# Altium PCB LOAD CONTROL_Final2.PcbDoc
Units mm, origin at the board's own origin, x right, y up, seen from the top; angles counter-clockwise.
Board outline 51.64 x 106.92 mm, 2 copper layers (Top Layer, Bottom Layer); 86 components, 56 nets, 284 pads, 4 vias.
Unrouted connection lines stored in the file: 126.
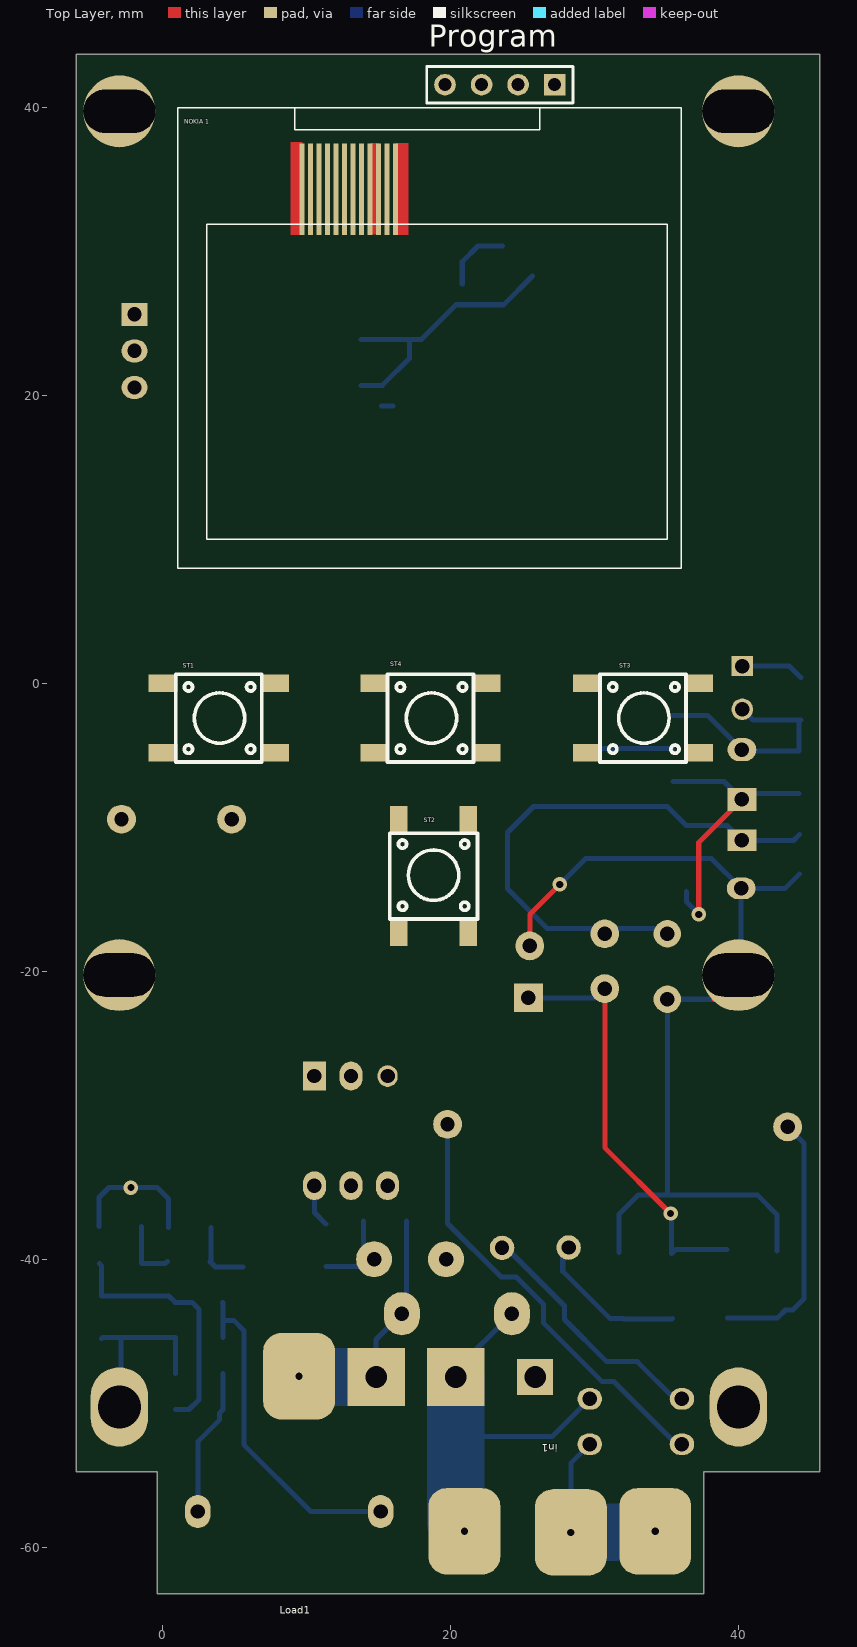
[diagram p0: Top Layer view]
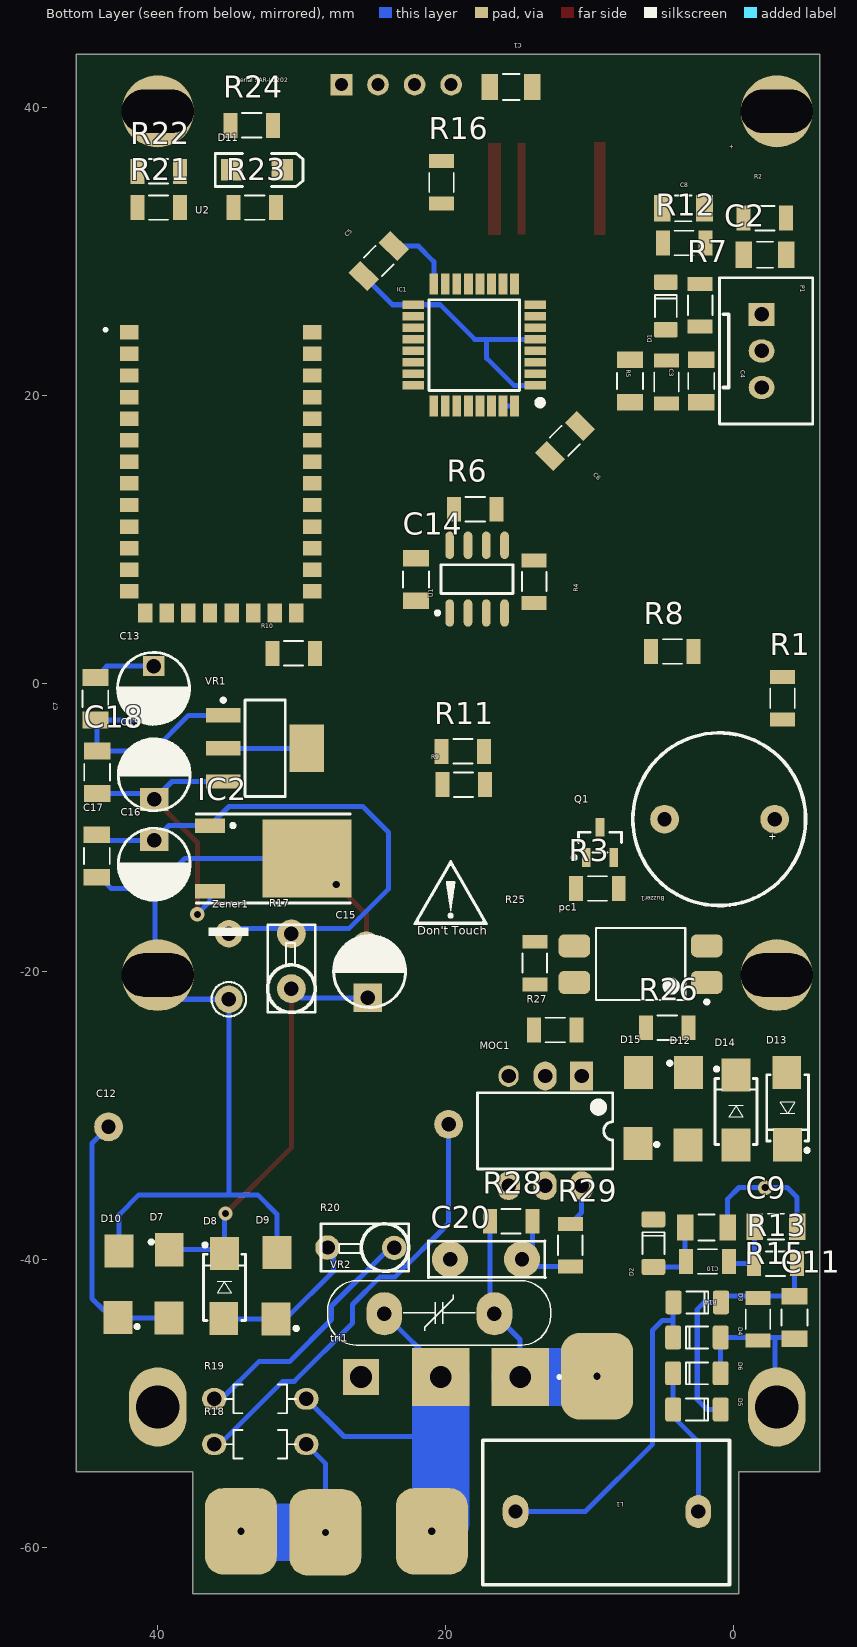
[diagram p1: Bottom Layer view, seen from below]

## Layer stack, top to bottom
Top Solder: solder mask 0.0102, Solder Resist, Dk 3.5
Top Layer: signal copper 0.0356
Dielectric 1: dielectric 0.32, FR-4, Dk 4.8
Bottom Layer: signal copper 0.0356
Bottom Solder: solder mask 0.0102, Solder Resist, Dk 3.5

## Board outline
-0.358,-63.231 -0.358,-54.77 -5.969,-54.77 -5.969,43.686 45.666,43.686 45.666,-54.77 37.592,-54.77 37.592,-63.231

## Design rules (kind name [scope] priority, off if disabled: settings)
Clearance Clearance_18 [InNamedPolygon('Top Layer-No Net')] p1: gap=0.4 ignorepadtopadclearanceinfootprint=FALSE
Clearance Clearance_17 [InNamedPolygon('Top Layer-No Net')] p2: gap=0.254 ignorepadtopadclearanceinfootprint=FALSE except(0: Arc-Hole Track-Hole SMDPad-Hole THPad-Hole Via-Hole Fill-Hole Poly-Hole Region-Hole Text-Hole)
Clearance Clearance_16 [InNamedPolygon('Top Layer-No Net')] p3: gap=0.4 ignorepadtopadclearanceinfootprint=FALSE
Clearance Clearance_15 [InNamedPolygon('GND_L02_P008')] p4: gap=0.3 ignorepadtopadclearanceinfootprint=TRUE
Clearance Clearance_14 [InNamedPolygon('GND_L01_P006')] p5: gap=0.381 ignorepadtopadclearanceinfootprint=TRUE
Clearance Clearance_13 [InNamedPolygon('GND_L01_P006')] p6: gap=0.381 ignorepadtopadclearanceinfootprint=TRUE
Clearance Clearance_12 [InNamedPolygon('GND_L01_P006')] p7: gap=0.2 ignorepadtopadclearanceinfootprint=FALSE
Clearance Clearance_11 [InNamedPolygon('GND_L01_P006')] p8: gap=0.254 ignorepadtopadclearanceinfootprint=FALSE except(0: Arc-Hole Track-Hole SMDPad-Hole THPad-Hole Via-Hole Fill-Hole Poly-Hole Region-Hole Text-Hole)
Clearance Clearance_10 [InNamedPolygon('GND_L02_P008')] p9: gap=0.5 ignorepadtopadclearanceinfootprint=FALSE
Clearance Clearance_9 [InNamedPolygon('GND_L01_P006')] p10: gap=0.5 ignorepadtopadclearanceinfootprint=FALSE
Clearance Clearance_8 [InNamedPolygon('GND_L01_P006')] p11: gap=0.254 ignorepadtopadclearanceinfootprint=FALSE except(0: Arc-Hole Track-Hole SMDPad-Hole THPad-Hole Via-Hole Fill-Hole Poly-Hole Region-Hole Text-Hole)
Clearance Clearance_7 [InNamedPolygon('GND_L01_P006')] p12: gap=0.5 ignorepadtopadclearanceinfootprint=FALSE
Clearance Clearance_6 [InNamedPolygon('GND_L01_P006')] p13: gap=0.254 ignorepadtopadclearanceinfootprint=FALSE except(0: Arc-Hole Track-Hole SMDPad-Hole THPad-Hole Via-Hole Fill-Hole Poly-Hole Region-Hole Text-Hole)
Clearance 0 [InNamedPolygon('GND_L01_P006')] p14: gap=0.254 ignorepadtopadclearanceinfootprint=FALSE except(0: Arc-Hole Track-Hole SMDPad-Hole THPad-Hole Via-Hole Fill-Hole Poly-Hole Region-Hole Text-Hole)
Clearance Clearance_5 [InNamedPolygon('GND_L01_P006')] p15: gap=0.254 ignorepadtopadclearanceinfootprint=FALSE except(0: Arc-Hole Track-Hole SMDPad-Hole THPad-Hole Via-Hole Fill-Hole Poly-Hole Region-Hole Text-Hole)
Clearance Clearance_4 [InNamedPolygon('GND-E_L02_P002')] p16: gap=0.508 ignorepadtopadclearanceinfootprint=FALSE
Clearance Clearance_3 [InNamedPolygon('GND_L01_P001')] p17: gap=0.635 ignorepadtopadclearanceinfootprint=FALSE
Clearance Clearance_2 [InNamedPolygon('GND_L02_P000')] p18: gap=0.508 ignorepadtopadclearanceinfootprint=FALSE
Clearance Clearance_1 [InNamedPolygon('Bottom Layer-GND')] p19: gap=0.356 ignorepadtopadclearanceinfootprint=FALSE
Clearance [All] p20: gap=0.3 ignorepadtopadclearanceinfootprint=FALSE
PolygonConnect PolygonConnect_14 [All vs IsNamedPolygon('GND_L02_P008')] p1: thpad.connectstyle=Relief thpad.reliefconductorwidth=0.762 thpad.reliefentries=4 thpad.polygonreliefangle="90 Angle" thpad.airgapwidth=0.3 smdpad.connectstyle=Relief smdpad.reliefconductorwidth=0.508 smdpad.reliefentries=4 smdpad.polygonreliefangle="90 Angle" smdpad.airgapwidth=0.3 via.connectstyle=Relief via.reliefconductorwidth=0.254 via.reliefentries=4 via.polygonreliefangle="90 Angle" via.airgapwidth=0.3
PolygonConnect PolygonConnect_13 [All vs IsNamedPolygon('GND_L01_P006')] p2: thpad.connectstyle=Relief thpad.reliefconductorwidth=0.889 thpad.reliefentries=4 thpad.polygonreliefangle="90 Angle" thpad.airgapwidth=0.254 smdpad.connectstyle=Relief smdpad.reliefconductorwidth=0.635 smdpad.reliefentries=4 smdpad.polygonreliefangle="90 Angle" smdpad.airgapwidth=0.254 via.connectstyle=Direct via.reliefconductorwidth=0.254 via.reliefentries=4 via.polygonreliefangle="90 Angle" via.airgapwidth=0.254
PolygonConnect PolygonConnect_12 [All vs IsNamedPolygon('GND_L01_P006')] p3: thpad.connectstyle=Relief thpad.reliefconductorwidth=0.889 thpad.reliefentries=4 thpad.polygonreliefangle="90 Angle" thpad.airgapwidth=0.254 smdpad.connectstyle=Relief smdpad.reliefconductorwidth=0.508 smdpad.reliefentries=4 smdpad.polygonreliefangle="90 Angle" smdpad.airgapwidth=0.254 via.connectstyle=Direct via.reliefconductorwidth=0.254 via.reliefentries=4 via.polygonreliefangle="90 Angle" via.airgapwidth=0.254
PolygonConnect PolygonConnect_11 [All vs IsNamedPolygon('GND_L01_P006')] p4: thpad.connectstyle=Relief thpad.reliefconductorwidth=0.508 thpad.reliefentries=4 thpad.polygonreliefangle="90 Angle" thpad.airgapwidth=0.254 smdpad.connectstyle=Relief smdpad.reliefconductorwidth=0.508 smdpad.reliefentries=4 smdpad.polygonreliefangle="90 Angle" smdpad.airgapwidth=0.254 via.connectstyle=Direct via.reliefconductorwidth=0.254 via.reliefentries=4 via.polygonreliefangle="90 Angle" via.airgapwidth=0.254
PolygonConnect PolygonConnect_10 [All vs IsNamedPolygon('GND_L01_P006')] p5: thpad.connectstyle=Relief thpad.reliefconductorwidth=0.254 thpad.reliefentries=4 thpad.polygonreliefangle="90 Angle" thpad.airgapwidth=0.254 smdpad.connectstyle=Relief smdpad.reliefconductorwidth=0.254 smdpad.reliefentries=4 smdpad.polygonreliefangle="90 Angle" smdpad.airgapwidth=0.254 via.connectstyle=Direct via.reliefconductorwidth=0.254 via.reliefentries=4 via.polygonreliefangle="90 Angle" via.airgapwidth=0.254
PolygonConnect PolygonConnect_9 [All vs IsNamedPolygon('GND_L01_P006')] p6: thpad.connectstyle=Direct thpad.reliefconductorwidth=0.254 thpad.reliefentries=4 thpad.polygonreliefangle="90 Angle" thpad.airgapwidth=0.254 smdpad.connectstyle=Relief smdpad.reliefconductorwidth=0.254 smdpad.reliefentries=4 smdpad.polygonreliefangle="90 Angle" smdpad.airgapwidth=0.254 via.connectstyle=Relief via.reliefconductorwidth=0.254 via.reliefentries=4 via.polygonreliefangle="90 Angle" via.airgapwidth=0.254
PolygonConnect PolygonConnect_8 [All vs IsNamedPolygon('GND_L01_P006')] p7: connectstyle=Relief reliefconductorwidth=0.254 reliefentries=4 polygonreliefangle="90 Angle" airgapwidth=0.254
PolygonConnect PolygonConnect_7 [All vs IsNamedPolygon('GND_L02_P008')] p8: connectstyle=Relief reliefconductorwidth=0.254 reliefentries=4 polygonreliefangle="90 Angle" airgapwidth=0.254
PolygonConnect PolygonConnect_6 [All vs IsNamedPolygon('GND_L02_P008')] p9: connectstyle=Direct reliefconductorwidth=0.254 reliefentries=4 polygonreliefangle="90 Angle" airgapwidth=0.254
PolygonConnect PolygonConnect_5 [All vs IsNamedPolygon('GND_L02_P008')] p10: thpad.connectstyle=Direct thpad.reliefconductorwidth=0.254 thpad.reliefentries=4 thpad.polygonreliefangle="90 Angle" thpad.airgapwidth=0.254 smdpad.connectstyle=Relief smdpad.reliefconductorwidth=0.254 smdpad.reliefentries=4 smdpad.polygonreliefangle="90 Angle" smdpad.airgapwidth=0.254 via.connectstyle=Relief via.reliefconductorwidth=0.254 via.reliefentries=4 via.polygonreliefangle="90 Angle" via.airgapwidth=0.254
PolygonConnect PolygonConnect_4 [All vs IsNamedPolygon('GND-E_L02_P002')] p11: thpad.connectstyle=Relief thpad.reliefconductorwidth=0.635 thpad.reliefentries=4 thpad.polygonreliefangle="90 Angle" thpad.airgapwidth=0.254 smdpad.connectstyle=Relief smdpad.reliefconductorwidth=0.381 smdpad.reliefentries=4 smdpad.polygonreliefangle="90 Angle" smdpad.airgapwidth=0.254 via.connectstyle=Direct via.reliefconductorwidth=0.254 via.reliefentries=4 via.polygonreliefangle="90 Angle" via.airgapwidth=0.254
PolygonConnect PolygonConnect_3 [All vs IsNamedPolygon('GND_L01_P001')] p12: thpad.connectstyle=Relief thpad.reliefconductorwidth=0.635 thpad.reliefentries=4 thpad.polygonreliefangle="90 Angle" thpad.airgapwidth=0.254 smdpad.connectstyle=Relief smdpad.reliefconductorwidth=0.635 smdpad.reliefentries=4 smdpad.polygonreliefangle="90 Angle" smdpad.airgapwidth=0.254 via.connectstyle=Direct via.reliefconductorwidth=0.254 via.reliefentries=4 via.polygonreliefangle="90 Angle" via.airgapwidth=0.254
PolygonConnect PolygonConnect_2 [All vs IsNamedPolygon('GND_L02_P000')] p13: thpad.connectstyle=Relief thpad.reliefconductorwidth=0.635 thpad.reliefentries=4 thpad.polygonreliefangle="90 Angle" thpad.airgapwidth=0.254 smdpad.connectstyle=Relief smdpad.reliefconductorwidth=0.254 smdpad.reliefentries=4 smdpad.polygonreliefangle="90 Angle" smdpad.airgapwidth=0.381 via.connectstyle=Direct via.reliefconductorwidth=0.254 via.reliefentries=4 via.polygonreliefangle="90 Angle" via.airgapwidth=0.254
PolygonConnect PolygonConnect_1 [All vs IsNamedPolygon('Bottom Layer-GND')] p14: thpad.connectstyle=Relief thpad.reliefconductorwidth=0.635 thpad.reliefentries=4 thpad.polygonreliefangle="90 Angle" thpad.airgapwidth=0.254 smdpad.connectstyle=Relief smdpad.reliefconductorwidth=0.381 smdpad.reliefentries=4 smdpad.polygonreliefangle="90 Angle" smdpad.airgapwidth=0.254 via.connectstyle=Direct via.reliefconductorwidth=0.254 via.reliefentries=4 via.polygonreliefangle="90 Angle" via.airgapwidth=0.254
PolygonConnect [All] p15: connectstyle=Direct reliefconductorwidth=0 reliefentries=2 polygonreliefangle="90 Angle" airgapwidth=0
RoutingVias [All] p1: holewidth=0.5 width=1 viastyle="Through Hole" minholewidth=0.5 minwidth=1 maxholewidth=0.5 maxwidth=1
SolderMaskExpansion [All] p1: expansion=0.102
Width [All] p1: maxlimit=4 minlimit=0.35 preferedwidth=0.5
30 further rules are at their usual default settings.

## Components (designator, comment, footprint, x,y, rotation, side; value= is the part's Value field where it differs from the comment)
Buzzer1 "Buzzer" BUZZER 0.838,-9.347 r270 bottom
C1 "C1206C120J5GACTU" CAPC3216X88N 15.469,41.427 r180 bottom
C2 "C1206C120J5GACTU" CAPC3216X88N -2.159,29.769 r180 bottom
C3 "C1206C120J5GACTU" CAPC3216X88N 7.214,21.006 r270 bottom
C4 "C1206C120J5GACTU" CAPC3216X88N 2.261,21.006 r90 bottom
C5 "C1206C120J5GACTU" CAPC3216X88N 24.663,29.337 r315 bottom
C6 "C1206C120J5GACTU" CAPC3216X88N 11.735,16.84 r135 bottom
C7 "C1206C120J5GACTU" CAPC3216X88N 44.348,-1.067 r90 bottom
C8 "C1206C120J5GACTU" CAPC3216X88N 3.505,32.995 r0 bottom
C9 "C1206C120J5GACTU" CAPC3216X88N -2.921,-37.744 r0 bottom
C10 "C1206C120J5GACTU" CAPC3216X88N 1.905,-37.795 r0 bottom
C11 "C1206C120J5GACTU" CAPC3216X88N -4.216,-44.044 r90 bottom
C12 "Cap" RAD-0.3 32.283,-33.426 r0 bottom value=1.5uf
C13 "1uF" "Cap electrolitic radial 5x11-2"#1 40.31,-0.254 r270 bottom
C14 "C1206C120J5GACTU" CAPC3216X88N 22.073,7.214 r90 bottom
C15 "1uF" "Cap electrolitic radial 5x11-2"#2 25.298,-20.117 r90 bottom
C16 "1uF" "Cap electrolitic radial 5x11-2"#3 40.259,-12.471 r270 bottom
C17 "C1206C120J5GACTU" CAPC3216X88N 44.247,-11.989 r90 bottom
C18 "C1206C120J5GACTU" CAPC3216X88N 44.221,-6.172 r270 bottom
C19 "1uF" "Cap electrolitic radial 5x11-2"#4 40.259,-6.452 r90 bottom
C20 "100nF" "Cap 10nF" 14.71,-40.005 r0 bottom
D1 "1N4148UR-1" "SOD80, LL-34" 4.724,26.213 r270 bottom
D2 "1N4148UR-1" "SOD80, LL-34" 5.588,-38.887 r270 bottom
D3 "1N4148UR-1" "SOD80, LL-34" 2.54,-43.002 r0 bottom
D4 "1N4148UR-1" "SOD80, LL-34" 2.565,-45.441 r180 bottom
D5 "1N4148UR-1" "SOD80, LL-34" 2.565,-50.444 r0 bottom
D6 "1N4148UR-1" "SOD80, LL-34" 2.565,-47.93 r180 bottom
D7 "1n4007" DIOM4629X24N#1 39.116,-41.758 r90 bottom
D8 "1n4007" DIOM4629X24N#2 35.382,-41.961 r90 bottom
D9 "1n4007" DIOM4629X24N#3 31.75,-41.859 r270 bottom
D10 "1n4007" DIOM4629X24N#4 42.799,-41.732 r270 bottom
D11 "SMD 1206 LED" "LED 1206" 33.122,35.662 r180 bottom
D12 "1n4007" DIOM4629X24N#5 3.099,-29.337 r90 bottom
D13 "1n4007" DIOM4629X24N#6 -3.734,-29.489 r270 bottom
D14 "1n4007" DIOM4629X24N#7 -0.152,-29.743 r90 bottom
D15 "1n4007" DIOM4629X24N#8 6.706,-29.083 r270 bottom
IC1 "STM32F030K6T6TR" QFP80P900X900X160-32N 18.034,23.495 r0 bottom
IC2 "L78M05" TO-252 33.02,-12.167 r270 bottom
in1 "220vIn" HDR1X2#1 48.438,-56.744 r0 top
L1 "0" ZMC 8.941,-57.531 r180 bottom value=300uH
Load1 "Header 2" HDR1X2#2 7.188,-67.234 r180 top
MOC1 "MOC3021-3" DIP-6 13.106,-31.09 r270 bottom
"NOKIA 1" "LCD2" "LCD NOKIA 1202" 18.732,23.98 r0 top
P1 "Header 3" 3PIN -1.93,23.089 r270 bottom
pc1 "PC817" "SMT Gullwing Lead-Form" 6.477,-19.507 r0 bottom
Program "Header 4" HDR1X4 27.254,41.58 r180 top
Q1 "BC817" SOT23_N 9.296,-11.049 r90 bottom
R1 "RC1206JR-0713RL" RESC3116X65N -3.378,-1.041 r270 bottom
R2 "RC1206JR-0713RL" RESC3116X65N -2.159,32.309 r0 bottom
R3 "RC1206JR-0713RL" RESC3116X65N 9.474,-14.249 r0 bottom
R4 "RC1206JR-0713RL" RESC3116X65N 13.868,7.061 r270 bottom
R5 "RC1206JR-0713RL" RESC3116X65N 4.674,20.93 r270 bottom
R6 "RC1206JR-0713RL" RESC3116X65N 17.965,12.09 r180 bottom
R7 "RC1206JR-0713RL" RESC3116X65N 2.337,26.264 r270 bottom
R8 "RC1206JR-0713RL" RESC3116X65N 4.267,2.21 r0 bottom
R9 "RC1206JR-0713RL" RESC3116X65N 18.771,-7.036 r0 bottom
R10 "RC1206JR-0713RL" RESC3116X65N 30.575,2.083 r0 bottom
R11 "RC1206JR-0713RL" RESC3116X65N 18.821,-4.724 r0 bottom
R12 "RC1206JR-0713RL" RESC3116X65N 3.454,30.582 r180 bottom
R13 "RC1206JR-0713RL" RESC3116X65N -2.896,-40.31 r180 bottom
R14 "RC1206JR-0713RL" RESC3116X65N 1.829,-40.157 r180 bottom
R15 "RC1206JR-0713RL" RESC3116X65N -1.676,-44.171 r90 bottom
R16 "RC1206JR-0713RL" RESC3116X65N 20.301,34.798 r90 bottom
R17 "10r" RES-(1/2)-Stand#1 30.734,-21.209 r90 bottom
R18 "1614997-1" RESAD640W45L370D200 32.893,-52.857 r0 bottom
R19 "1614997-1" RESAD640W45L370D200 32.893,-49.708 r0 bottom
R20 "10r" RES-(1/2)-Stand#2 24.232,-39.192 r0 bottom
R21 "RC1206JR-0713RL" RESC3116X65N 39.954,33.045 r180 bottom
R22 "RC1206JR-0713RL" RESC3116X65N 39.954,35.56 r180 bottom
R23 "RC1206JR-0713RL" RESC3116X65N 33.274,33.045 r0 bottom
R24 "RC1206JR-0713RL" RESC3116X65N 33.484,38.76 r0 bottom
R25 "RC1206JR-0713RL" RESC3116X65N 13.818,-19.431 r90 bottom
R26 "RC1206JR-0713RL" RESC3116X65N 4.623,-23.927 r0 bottom
R27 "RC1206JR-0713RL" RESC3116X65N 12.402,-24.079 r0 bottom
R28 "RC1206JR-0713RL" RESC3116X65N 15.469,-37.363 r0 bottom
R29 "RC1206JR-0713RL" RESC3116X65N 11.354,-39.033 r90 bottom
ST1 "SW-PB" "PUSH BOTTOM 6*6" 3.974,-2.286 r90 top
ST2 "SW-PB" "PUSH BOTTOM 6*6" 18.716,-13.327 r180 top
ST3 "SW-PB" "PUSH BOTTOM 6*6" 33.451,-2.286 r90 top
ST4 "SW-PB" "PUSH BOTTOM 6*6" 18.694,-2.286 r90 top
tri1 "BTA41" TO552P1530X450X2110-3B 20.371,-48.184 r0 bottom
U1 "Serial EEPROM(24C04)" SO8_L 17.831,7.239 r90 bottom
U2 "HC-05" XCVR_HC-05 35.636,18.059 r180 bottom
VR1 "AMS1117-xx" SOT-223 32.563,-4.521 r0 bottom
VR2 "xxDxxx" "14D XXX" 20.472,-43.739 r180 bottom
Zener1 "Diode Zener" "Diode 1W_Stand" 35.103,-19.964 r90 bottom

## Footprints (in the part's own frame and the unit in brackets; to place one, negate y for a bottom-side part, rotate by r counter-clockwise, add the part's x,y. Pads: shape width x height; smd on the part's side, far side on the other; paste and mask are expansions set on the pad)
3PIN [mm]
  rect 1.6x1.8 hole 1: 1(-2.54,0)
  oval 1.6x1.8 hole 1: 2(0,0) 3(2.54,0)
  silkscreen extent -5.08,-2.92 5.08,3.56, body extent -4.95,-2.9 4.95,3.49, height 7
"14D XXX" [mm] "MOV-14DxxxK Metal Oxide Varistors (MOVs) are 14 mm-Design:Abbas Basereh"
  oval 2.5x3 hole 1: 1(3.836,-0.051) 2(-3.81,-0.051)
  silkscreen extent -7.75,-2.25 7.75,2.25, body extent -7.73,-2.1 7.77,2.1, height 19.5
BUZZER [mm]
  round 2 hole 1: 1(0.092,3.675) 2(0.092,-3.975)
  silkscreen extent -5.91,-6.17 6.09,5.82, body extent -5.75,-6.25 6.25,5.75, height 9.5
"Cap 10nF" [mm]
  round 2.5 hole 1: 1(0,0) 2(5,0)
  silkscreen extent -1.62,-1.28 6.51,1.29
"Cap electrolitic radial 5x11-2"#1 [mm] "Cap electrolitic radial 5x11-2-Design:Abbas Basereh"
  rect 1.4x1.5 hole 1: 1(-1.448,0.025)
  round 1.5 hole 1: 2(1.549,0.025)
  silkscreen extent -2.4,-2.5 2.6,2.5, body extent -2.5,-2.5 2.5,2.5, height 11.3
"Cap electrolitic radial 5x11-2"#2 [mm] "Cap electrolitic radial 5x11-2-Design:Abbas Basereh"
  rect 2x2 hole 1: 1(-1.727,0.127)
  round 2 hole 1: 2(1.88,0.229)
  silkscreen extent -2.4,-2.5 2.6,2.5, body extent -2.5,-2.5 2.5,2.5, height 11.3
"Cap electrolitic radial 5x11-2"#3 [mm] "Cap electrolitic radial 5x11-2-Design:Abbas Basereh"
  rect 1.5x2 hole 1: 1(-1.559,0)
  oval 1.5x2 hole 1: 2(1.769,0.051)
  silkscreen extent -2.4,-2.5 2.6,2.5, body extent -2.5,-2.5 2.5,2.5, height 11.3
"Cap electrolitic radial 5x11-2"#4 [mm] "Cap electrolitic radial 5x11-2-Design:Abbas Basereh"
  rect 1.6x2 hole 1: 1(-1.61,0)
  oval 1.6x2 hole 1: 2(1.845,0)
  silkscreen extent -2.4,-2.5 2.6,2.5, body extent -2.5,-2.5 2.5,2.5, height 11.3
CAPC3216X88N [mm]
  rect 1.16x1.82 smd: 1(-1.475,0) 2(1.475,0)
  silkscreen extent -0.57,-0.9 0.57,0.9, body extent -1.6,-0.8 1.6,0.8, height 0.88
"Diode 1W_Stand" [mil]
  round 75 hole 39.37: 1(-78,-1) 2(101,-1)
  silkscreen extent -125,-55 118,55, body extent -103,-52 65,53, height 291
DIOM4629X24N#1 [mm] "Molded Diode, 2-Leads, Body 4/60x2/90mm, IPC Medium Density-Design:Abbas Basereh"
  rect 2.3x2 smd: 1(-2.337,0.127) 2(2.413,0.102)
  silkscreen extent 2.83,1.23 3.07,1.48, body extent -2.5,-1.22 2.5,1.48, height 2.2
DIOM4629X24N#2 [mm] "Molded Diode, 2-Leads, Body 4/60x2/90mm, IPC Medium Density-Design:Abbas Basereh"
  rect 2.3x2 smd: 1(-2.152,0.05) 2(2.344,-0.001)
  silkscreen extent -2.3,-1.45 3.07,1.48, body extent -2.5,-1.22 2.5,1.48, height 2.2
DIOM4629X24N#3 [mm] "Molded Diode, 2-Leads, Body 4/60x2/90mm, IPC Medium Density-Design:Abbas Basereh"
  rect 2.3x2 smd: 1(-2.33,0.025) 2(2.286,-0.051)
  silkscreen extent 2.83,1.22 3.07,1.47, body extent -2.5,-1.22 2.5,1.48, height 2.2
DIOM4629X24N#4 [mm] "Molded Diode, 2-Leads, Body 4/60x2/90mm, IPC Medium Density-Design:Abbas Basereh"
  rect 2.3x2 smd: 1(-2.297,0.102) 2(2.311,0.025)
  silkscreen extent 2.83,1.22 3.07,1.47, body extent -2.5,-1.22 2.5,1.48, height 2.2
DIOM4629X24N#5 [mm] "Molded Diode, 2-Leads, Body 4/60x2/90mm, IPC Medium Density-Design:Abbas Basereh"
  rect 2.3x2 smd: 1(-2.722,0.076) 2(2.311,0.051)
  silkscreen extent 2.83,1.23 3.07,1.48, body extent -2.5,-1.22 2.5,1.48, height 2.2
DIOM4629X24N#6 [mm] "Molded Diode, 2-Leads, Body 4/60x2/90mm, IPC Medium Density-Design:Abbas Basereh"
  rect 2.3x2 smd: 1(-2.464,-0.051) 2(2.565,0)
  silkscreen extent -2.3,-1.45 3.07,1.47, body extent -2.5,-1.22 2.5,1.48, height 2.2
DIOM4629X24N#7 [mm] "Molded Diode, 2-Leads, Body 4/60x2/90mm, IPC Medium Density-Design:Abbas Basereh"
  rect 2.3x2 smd: 1(-2.337,0) 2(2.54,0)
  silkscreen extent -2.3,-1.45 3.07,1.48, body extent -2.5,-1.22 2.5,1.48, height 2.2
DIOM4629X24N#8 [mm] "Molded Diode, 2-Leads, Body 4/60x2/90mm, IPC Medium Density-Design:Abbas Basereh"
  rect 2.3x2 smd: 1(-2.058,0.076) 2(2.896,0.051)
  silkscreen extent 2.83,1.22 3.07,1.47, body extent -2.5,-1.22 2.5,1.48, height 2.2
DIP-6 [mm] "DIP; 6 Leads; Row Spacing 7.62 mm; Pitch 2.54 mm"
  rect 2x1.6 hole 1: 1(-3.81,2.54)
  oval 2x1.6 hole 1: 2(-3.81,0) 4(3.81,-2.54) 5(3.81,0) 6(3.81,2.54)
  oval 1.5x1.4 hole 1: 3(-3.81,-2.54)
  silkscreen extent -2.65,-4.7 2.65,4.7
HDR1X2#1 [mm] "Connector; Header; 2 Position"
  rrect50% 5x6 hole 0.5: 1(-27.457,-2.159) 2(-20.066,-2.235)
HDR1X2#2 [mm] "Connector; Header; 2 Position"
  rrect50% 5x6 hole 0.5: 1(-27.051,-8.331) 2(-2.311,-19.101)
HDR1X4 [mm] "Connector; Header; 4 Position"
  rect 1.5x1.5 hole 0.9: 1(0,0)
  round 1.5 hole 0.9: 2(2.54,0) 3(5.08,0) 4(7.62,0)
  silkscreen extent -1.27,-1.27 8.89,1.27
"LCD NOKIA 1202" [mm]
  rect 0.35x6.35 smd: 1(-9.039,10.344) 2(-8.448,10.344) 3(-7.857,10.344) 4(-7.267,10.344) 5(-6.676,10.344) 6(-6.085,10.344) 7(-5.494,10.344) 8(-4.903,10.344) 9(-4.312,10.344) 10(-3.721,10.344) 11(-3.13,10.344) 12(-2.539,10.344)
  silkscreen extent -17.68,-15.99 17.32,16.01, body extent -17.52,-15.75 18.28,15.85, height 2.51
"LED 1206" [mm]
  rect 1.5x1.5 smd: 1(-1.75,0) 2(1.75,0)
  silkscreen extent -2.9,-1.15 3.2,1.15, body extent -1.65,-0.72 1.65,0.73, height 1.36
"PUSH BOTTOM 6*6" [mm]
  rect 1.2x2 smd: 1(-2.54,3.937) 1(-2.54,-3.81) 2(2.286,-3.81) 2(2.286,3.937)
  silkscreen extent -3.18,-2.92 2.92,3.05, body extent -3.13,-4.5 2.87,4.5, height 4.2
QFP80P900X900X160-32N [mm] "Integrated Circuit"
  rect 1.475x0.6 smd: 1(-4.238,2.8) 2(-4.238,2) 3(-4.238,1.2) 4(-4.238,0.4) 5(-4.238,-0.4) 6(-4.238,-1.2) 7(-4.238,-2) 8(-4.238,-2.8) 17(4.238,-2.8) 18(4.238,-2) 19(4.238,-1.2) 20(4.238,-0.4) 21(4.238,0.4) 22(4.238,1.2) 23(4.238,2) 24(4.238,2.8)
  rect 0.6x1.475 smd: 9(-2.8,-4.238) 10(-2,-4.238) 11(-1.2,-4.238) 12(-0.4,-4.238) 13(0.4,-4.238) 14(1.2,-4.238) 15(2,-4.238) 16(2.8,-4.238) 25(2.8,4.238) 26(2,4.238) 27(1.2,4.238) 28(0.4,4.238) 29(-0.4,4.238) 30(-1.2,4.238) 31(-2,4.238) 32(-2.8,4.238)
  silkscreen extent -4.77,-3.15 3.15,4.2, body extent -4.5,-4.5 4.5,4.5, height 1.6
RAD-0.3 [mm] "Radial Cap, Thru-Hole; 2 Leads; 0.3 in Pin Spacing"
  round 2 hole 1: 1(-12.471,-2.794) 2(11.151,-2.616)
RES-(1/2)-Stand#1 [mm]
  round 2 hole 1: 1(0,0) 2(3.81,0)
  silkscreen extent -1.65,-1.65 4.44,1.65, body extent -1.68,-1.67 4.14,1.67, height 11
RES-(1/2)-Stand#2 [mm]
  round 1.7 hole 1: 1(-0.635,0.025) 2(3.988,0)
  silkscreen extent -1.65,-1.65 4.44,1.65, body extent -1.68,-1.67 4.14,1.67, height 11
RESAD640W45L370D200 [mm]
  oval 1.7x1.5 hole 1: 1(-3.2,0) 2(3.2,0)
  silkscreen extent -2.47,-1 2.47,1, body extent -3.42,-1 3.42,1, height 2
RESC3116X65N [mm]
  rect 0.97x1.73 smd: 1(-1.48,0) 2(1.48,0)
  silkscreen extent -0.67,-0.85 0.67,0.85, body extent -1.55,-0.8 1.55,0.8, height 0.65
"SMT Gullwing Lead-Form" [mm] "SOP, 4-Leads, Body 4/65x6/75mm, Pitch 2/54mm, IPC Medium Density designer:abbas basereh"
  rrect50% 2.2x1.6 smd mask+0.06: 1(-4.6,1.27) 2(-4.6,-1.27) 3(4.6,-1.27) 4(4.6,1.27)
  silkscreen extent -4.72,-2.5 3.1,2.74, body extent -5,-2.29 5,2.29, height 3.89
SO8_L [mm] "SOIC, 8-Leads, Body 4.9x3.9mm, Pitch 1.27mm, IPC High Density"
  oval 1.9x0.6 smd: 1(-2.35,1.905) 2(-2.35,0.635) 3(-2.35,-0.635) 4(-2.35,-1.905) 5(2.35,-1.905) 6(2.35,-0.635) 7(2.35,0.635) 8(2.35,1.905)
  silkscreen extent -2.47,-2.5 1,2.88, body extent -2,-2.5 2,2.5, height 1.75
"SOD80, LL-34" [mm] "Diode, MiniMELF"
  round 0.5 on Mech15: 0(0,0)
  rrect25% 1.1x1.65 smd: 1(1.65,0) 2(-1.65,0)
  silkscreen extent -0.76,-0.76 0.76,0.76, body extent -1.88,-0.8 1.82,0.8, height 1.6
SOT23_N [mm] "SOT23, 3-Leads, Body 2.9x1.3mm, Pitch 0.95mm, Lead Span 2.3mm, IPC Medium Density"
  rect 1.3x0.6 smd: 1(-1.05,0.95) 2(-1.05,-0.95) 3(1.05,0)
  silkscreen extent -1.17,-1.5 0.7,1.93, body extent -1.27,-1.5 1.27,1.5, height 1.1
SOT-223 [mm]
  rect 2.4x1 smd: 1(2.9,-2.3) 2(2.9,0) 3(2.9,2.3)
  rect 2.4x3.3 smd: 4(-2.9,0)
  silkscreen extent -1.4,-3.47 3.03,3.35, body extent -3.49,-3.24 3.49,3.24, height 1.64
TO552P1530X450X2110-3B [mm]
  rect 4x4 hole 1.5: 1(-5.525,0) 2(0,0)
  rect 2.5x2.5 hole 1.5: 3(5.525,0)
  silkscreen extent -8.35,-0.1 -8.15,0.1, body extent -7.65,-1.4 7.65,3.1, height 21.1
TO-252 [mm] "D-PAK/TO-252-AA; 3 Leads (1 Cropped); Body 10.1 (inc. leads) x 6.6 mm (LxW max)"
  rect 1x2.1 smd: 1(-2.285,-3.375) 3(2.285,-3.375)
  rect 5.4x6.2 smd: 4(0,3.375)
  silkscreen extent -3.08,-4.32 3.09,6.38, body extent -3.27,-4.11 3.27,5.83, height 2.39
XCVR_HC-05 [mm]
  rect 1.3x1 smd: 1(-6.35,6.325) 2(-6.35,4.825) 3(-6.35,3.325) 4(-6.35,1.825) 5(-6.35,0.325) 6(-6.35,-1.175) 7(-6.35,-2.675) 8(-6.35,-4.175) 9(-6.35,-5.675) 10(-6.35,-7.175) 11(-6.35,-8.675) 12(-6.35,-10.175) 13(-6.35,-11.675) 22(6.35,-11.675) 23(6.35,-10.175) 24(6.35,-8.675) 25(6.35,-7.175) 26(6.35,-5.675) 27(6.35,-4.175) 28(6.35,-2.675) 29(6.35,-1.175) 30(6.35,0.325) 31(6.35,1.825) 32(6.35,3.325) 33(6.35,4.825) 34(6.35,6.325)
  rect 1x1.3 smd: 14(-5.25,-13.175) 15(-3.75,-13.175) 16(-2.25,-13.175) 17(-0.75,-13.175) 18(0.75,-13.175) 19(2.25,-13.175) 20(3.75,-13.175) 21(5.25,-13.175)
  silkscreen extent -8.1,6.4 -7.9,6.6, body extent -6.5,-13.45 6.5,13.45, height 2.2
ZMC [mil]
  oval 70x90 hole 39.37: 1(-245,0) 2(255,0)
  silkscreen extent -335,-200 340,195, body extent -334,-199 335,199, height 53

## Part data
C1 C2 C3 C4 C5 C6 C7 C8 C9 C10 C11 C14 C17 C18: "1206 C 12pF Ceramic Multilayer Capacitor, 50 VDC, +125degC, C0G Dielec, +/-5%", Package="3216 KEMET", Check_prices=https://www.snapeda.com/parts/C1206C120J5GACTU/KEMET/view-part/?ref=eda, MF=KEMET, MP=C1206C120J5GACTU, SnapEDA_Link=https://www.snapeda.com/parts/C1206C120J5GACTU/KEMET/view-part/?ref=snap
C12: "Capacitor", LatestRevisionDate=17-Jul-2002, LatestRevisionNote="Re-released for DXP Platform.", PackageDescription="Radial Cap, Thru-Hole; 2 Leads; 0.3 in Pin Spacing", PackageReference=RAD-0.3, Published=8-Jun-2000, Publisher="Altium Limited"
C13 C15 C16 C19: library part "Cap ELECTROLITIC TOTAL SIZE", "Cap electrolitic radial", Data=16-12-2016, Designer="Abbas Basereh"
C20: library part Cap-Bipolar, "Bipolar Capacitor", Voltage=100V, Adding Date=1387/12/20, Designer="Saeid Jorablo", Organazation=ControTec
D1 D2 D3 D4 D5 D6: "DIODE GEN PURP 75V 200MA DO213AA", ComponentLink1Description="Manufacturer Link", ComponentLink1URL=http://www.digikey.com/product-detail/en/microsemi-corporation/1N4148UR-1/1N4148UR-1-ND/4377991, ComponentLink2Description=Datasheet, PackageDescription="DIODE GEN PURP 75V 200MA DO213AA", PackageReference=DO-213AA&SOD-80, PackageVersion=2017-1-12, PART.NO=1N4148UR-1, Published=2017-1-12, Publisher="Abbas Basereh"
D7 D8 D9 D10 D12 D13 D14 D15: library part "1n4007 SMD M7", "Standard Rectifiers", Manufacturer="DC COMPONENTS", Data=16-12-2016, Designer="Abbas Basereh", Link=http://www.tme.eu/en/details/m7/smd-universal-diodes/dc-components/, Part. No=M7
D11: library part "LED SMD 1206"
IC1: "Integrated Circuit", Manufacturer_Name=STMicroelectronics, Mouser Part Number=511-STM32F030K6T6TR, Arrow Part Number=STM32F030K6T6TR, Arrow Price/Stock=https://www.arrow.com/en/products/stm32f030k6t6tr/stmicroelectronics, Datasheet Link=http://www.st.com/content/ccc/resource/technical/document/datasheet/a4/5d/0b/0e/87/c4/4d/71/DM00088500.pdf/files/DM00088500.pdf/jcr:content/translations/en.DM00088500.pdf, Height=1.6mm, Manufacturer_Part_Number=STM32F030K6T6TR, Mouser Price/Stock=https://www.mouser.co.uk/ProductDetail/STMicroelectronics/STM32F030K6T6TR/?qs=9MuLHSklicort60U4QZudQ%3D%3D
IC2: "Precision 500mA Regulator"
in1: library part "Header 2", "Header, 2-Pin", LatestRevisionDate=17-Jul-2002, LatestRevisionNote="Re-released for DXP Platform.", Publisher="Altium Limited"
L1: library part Inductor, "Inductor", Code_IEC=1005, Code_JEITA=0402, LatestRevisionDate=29-May-2009, LatestRevisionNote="IPC-7351 Footprint Added.", PackageDescription="Chip Inductor", PackageReference=0402-A, Published=8-Jun-2000, Publisher="Altium Limited"
Load1: "Header, 2-Pin", LatestRevisionDate=17-Jul-2002, LatestRevisionNote="Re-released for DXP Platform.", Publisher="Altium Limited"
MOC1: "Opto-Triac", Designer="Seyed Mohsen Ghasemian", E-mail=picpars@gmail.com, LatestRevisionDate=17-11-2011, Published=17-11-2011, Publisher=www.picpars.com, WEB=www.picpars.com
"NOKIA 1": library part "NOKIA 1202"
P1: "Header, 3-Pin", LatestRevisionDate=17-Jul-2002, LatestRevisionNote="Re-released for DXP Platform.", Publisher="Altium Limited"
pc1: library part PC817XI, "DIP 4pin General Purpose  Photocoupler", ComponentLink1Description="Manufacturer Link", ComponentLink1URL=http://www.roboeq.ir/files/id/233/name/PC817.pdf/, ComponentLink2Description="DIP 4pin General Purpose", DatasheetVersion=2017-2-27, PackageDescription="SOP, 4-Leads, Body 4/65x6/75mm, Pitch 2/54mm, IPC Medium Density designer:abbas basereh", PackageReference="SMT Gullwing Lead-Form", PackageVersion=2017-2-27, Published=2017-2-27, Publisher="Abbas Basereh"
Program: "Header, 4-Pin", LatestRevisionDate=17-Jul-2002, LatestRevisionNote="Re-released for DXP Platform.", Publisher="Altium Limited"
Q1: "45 V, 500 mA NPN general-purpose transistors", ComponentLink1Description="Manufacturer Link", ComponentLink1URL=http://www.nxp.com/, ComponentLink2Description=Datasheet, ComponentLink2URL=http://www.nxp.com/, DatasheetVersion=2017, LatestRevisionDate=2017, LatestRevisionNote="IPC-7351 Footprint Added.", PackageDescription="3-Pin SOT-23 Package 0.95 mm Pitch, 2.3 mm Lead Span", PackageReference=SOT23, PackageVersion=2017-2-8, Published=2017-2-8, Publisher="Abbas Basereh"
R1 R2 R3 R4 R5 R6 R7 R8 R9 R10 R11 R12 R13 R14 R15 R16 R21 R22 R23 R24 R25 R26 R27 R28 R29: "13 Ohms ±5% 0.25W, 1/4W Chip Resistor 1206 (3216 Metric) Moisture Resistant Thick Film", Package="3116 Yageo", Availability="In Stock", Check_prices=https://www.snapeda.com/parts/RC1206JR-0713RL/Yageo/view-part/?ref=eda, MF=Yageo, MP=RC1206JR-0713RL, Price=None, Purchase-URL=https://pricing.snapeda.com/search/part/RC1206JR-0713RL/?ref=eda, SnapEDA_Link=https://www.snapeda.com/parts/RC1206JR-0713RL/Yageo/view-part/?ref=snap
R17 R20: library part "RES DIP PACKAGE", "TOTAL DIP RESISTOR PACK", Designer="Ali Hafizi"
R18 R19: library part LR0204F13K3, "13.3 kOhms ±1% 0.25W, 1/4W Through Hole Resistor Axial - Metal Film", Package="Axial TE Connectivity Passive Product", Check_prices=https://www.snapeda.com/parts/LR0204F13K3/TE/view-part/?ref=eda, MF="TE Connectivity Passive Product", MP=LR0204F13K3, SnapEDA_Link=https://www.snapeda.com/parts/LR0204F13K3/TE/view-part/?ref=snap
ST1 ST2 ST3 ST4: "Switch", LatestRevisionDate=17-Jul-2002, LatestRevisionNote="Re-released for DXP Platform.", PackageDescription="Switch; 2 Leads", PackageReference=SPST-2, Published=24-Mar-1999, Publisher="Altium Limited"
tri1: library part BTA41-600A, "Thyristors, Discretes (diodes, transistors, thyristors ...), Semiconductors and Actives, original, triac, thyristors", Package="TOP-3 STMicroelectronics", Check_prices=https://www.snapeda.com/parts/BTA41-600A/STMicroelectronics/view-part/?ref=eda, MF=STMicroelectronics, MP=BTA41-600A, SnapEDA_Link=https://www.snapeda.com/parts/BTA41-600A/STMicroelectronics/view-part/?ref=snap
U1: library part AT24C512, "EEPROM"
U2: "Bluetooth to Serial Port Module", Package="Module ITead Studio", Check_prices=https://www.snapeda.com/parts/HC-05/ITEAD/view-part/?ref=eda, MF="ITead Studio", MP=HC-05, SnapEDA_Link=https://www.snapeda.com/parts/HC-05/ITEAD/view-part/?ref=snap
VR1: library part AMS1117
VR2: library part "VARISTOR (VDR)", "VARISTORS", Manufacturer=china-canada-philipina, Data=2017-1-5, Designer="Abbas Basereh", Link=digikey.com, Models=MOV-VDR-COV, Publisher="ABBAS BASEREH"
Zener1: "Zener Diode", Voltage="3.3 V", Company=E.P.I.L, Design Date=2011/11/02, Designer="Saeid Jorablo"
Buzzer1: ComponentLinkURL=www.picpars.com, Designer="Seyed Mohsen Ghasemain"

## Free pads (board coordinates)
  oval 4x5.5 hole 3: ""(-2.984,-50.265) ""(40.016,-50.265)
  round 5 hole 3 slot 5 at 0 deg: ""(-2.984,-20.265) ""(-2.984,39.735) ""(40.016,-20.265) ""(40.016,39.735)

## Via types
v1: diameter 1, hole 0.5, Top Layer to Bottom Layer, 4 vias

## Nets (pads, with @x,y where several pads share a name; then routed paths per layer and width w, separated by ;. In a path a pad name is that pad's centre, name@x,y a point inside that pad or via, vN(x,y) a via of type N, cw(c..) or ccw(c..) an arc to the next point about the centre after c; other vN are vias at no path point)
9v: C16.1 C17.2 IC2.1 R17.2 Zener1.2 | length 38.3
  Bottom Layer w0.35: Zener1.2@35.103,-17.018 26.721,-17.018 23.978,-14.275 23.978,-10.363 25.781,-8.56 35.073,-8.56 IC2.1 39.228,-9.882 C16.1 43.848,-10.913 C17.2
adc3.4: IC1.10
amper: C10.2 D2.1 IC1.7 R14.1 | length 4.8
  Bottom Layer w0.35: C10.2 3.38,-40.086 R14.1 3.689,-40.537 D2.1
backlight: IC1.15 R16.1
buzzer: IC1.21 R3.1
GND: "NOKIA 1.1" "NOKIA 1.4" "NOKIA 1.9" "NOKIA 1.10" "NOKIA 1.12" C1.1 C2.2 C3.1 C4.1 C5.1 C6.1 C7.1 C8.1 C9.1 C10.1 C11.1 C13.2 C14.1 C15.2 C16.2 C17.1 C18.1 C19.2 D4.1 D6.1 D9.1 D10.1 D11.1 IC1.16 IC1.31 IC1.32 IC2.4 MOC1.2 P1.3 pad.@40.016,39.735 pad.@40.016,-20.265 pad.@-2.984,39.735 pad.@-2.984,-20.265 pad.@-2.984,-50.265 pc1.3 Program.1 Q1.2 R7.1 R15.1 R24.1 ST1.1 ST2.1 ST3.1 ST4.1 U1.1 U1.2 U1.3 U1.4 U1.7 U2.13 U2.21 U2.22 VR1.1 Zener1.1 | length 112.8
  Top Layer w0.35: C15.2 25.527,-16.053 v1(27.61,-13.97) ; pad.@38.335,-21.946 pad.@40.016,-20.265
  Bottom Layer w0.35: C9.1 -4.396,-35.714 -3.708,-35.027 v1(-2.184,-35.027) -0.356,-35.027 0.43,-35.812 C10.1 ; C11.1 -4.138,-45.441 -2.87,-45.441 ; pad.@-2.984,-50.265 -2.87,-50.151 -2.87,-45.441 ; D6.1 D4.1 -2.87,-45.441 ; IC1.32 IC1.31 ; IC1.16 20.834,29.292 21.922,30.38 C5.1 ; v1(27.61,-13.97) 29.413,-12.167 IC2.4 38.135,-12.167 C16.2 ; D9.1 31.725,-36.88 33.071,-35.535 35.204,-35.535 ; VR1.1 37.873,-2.221 C19.2 40.349,-4.697 C18.1 44.221,-2.669 C7.1 41.023,-2.542 C13.2 ; D10.1 42.697,-36.906 41.326,-35.535 35.204,-35.535 ; C17.1@44.272,-13.235 43.267,-14.24 C16.2 ; 35.204,-35.535 35.077,-35.408 Zener1.1 38.335,-21.946 40.016,-20.265 40.208,-20.073 C16.2
INPUT: C3.2 D1.1 IC1.6 R5.2 R7.2
L: D12.1 D15.2 in1.2 Load1.1 R18.1 | length 12.6
  Bottom Layer w0.35: in1.2 28.372,-54.179 R18.1
  Bottom Layer w4: in1.2 34.163,-58.979 Load1.1
LCD-DN: "NOKIA 1.5" IC1.13
LCD-RST: "NOKIA 1.2" IC1.11
LCD-SCE: "NOKIA 1.3" IC1.12
LCD-SCLK: "NOKIA 1.6" IC1.14
n: C20.2 D13.2 D14.1 in1.1 R19.1 tri1.2 VR2.2 | length 27.4
  Bottom Layer w0.35: 20.371,-52.324 27.077,-52.324 R19.1 ; tri1.2 20.371,-47.701 VR2.2
  Bottom Layer w4: tri1.2 20.371,-52.324 20.371,-58.293 in1.1
NetBuzzer1_1: Buzzer1.1 R1.2
NetBuzzer1_2: Buzzer1.2 Q1.3
NetC2_1: C2.1 P1.1 R2.2
NetC9_2: C9.2 R13.1 R14.2 | length 4.4
  Bottom Layer w0.35: C9.2 -1.446,-40.279 R13.1 0.196,-40.31 R14.2
NetC11_2: C11.2 D3.2 D5.2 R13.2 R15.2 | length 17.6
  Bottom Layer w0.35: R13.2 -4.216,-40.469 C11.2 0.456,-42.569 D3.2 2.057,-43.002 2.54,-43.485 2.54,-49.759 1.854,-50.444 D5.2
NetC12_1: C12.1 R18.2 | length 30.3
  Bottom Layer w0.35: C12.1 19.812,-37.516 23.52,-41.224 24.562,-41.224 26.492,-43.155 26.492,-44.45 30.525,-48.483 31.338,-48.483 35.712,-52.857 R18.2
NetC12_2: C12.2 D7.1 D10.2 | length 18.3
  Bottom Layer w0.35: D7.1 42.723,-44.094 D10.2 43.282,-43.536 43.79,-43.536 44.577,-42.748 44.577,-31.953 C12.2
NetC15_1: C15.1 D7.2 D8.2 R17.1 | length 29.9
  Top Layer w0.35: R17.1 30.734,-32.258 v1(35.306,-36.83)
  Bottom Layer w0.35: C15.1 30.099,-21.844 R17.1 ; v1(35.306,-36.83) 35.382,-36.906 D8.2 35.654,-39.345 D7.2
NetC20_1: C20.1 R28.1 R29.1 | length 6.5
  Bottom Layer w0.35: R29.1 14.202,-40.513 C20.1 13.989,-39.283 R28.1
NetD3_1: D3.1 D4.2 L1.1 | length 23.6
  Bottom Layer w0.35: D3.1 4.215,-43.028 4.215,-44.171 ; D4.2 4.215,-44.171 ; L1.1 10.312,-57.531 5.664,-52.883 5.664,-44.958 4.953,-44.247 4.292,-44.247 4.215,-44.171
NetD5_1: D5.1 D6.2 L1.2 | length 10.3
  Bottom Layer w0.35: L1.2 2.464,-52.68 3.962,-51.181 3.962,-50.697 D5.1 D6.2
NetD8_1: D8.1 D9.2 R20.2 | length 10.7
  Bottom Layer w0.35: R20.2@27.813,-39.192 27.813,-40.843 31.083,-44.113 32.048,-44.113 32.08,-44.145 35.4,-44.145 D8.1
NetD11_2: D11.2 R23.1
NetD12_2: D12.2 D14.2 pc1.2
NetD13_1: D13.1 D15.1 R26.2
NetLoad1_2: Load1.2 R28.2 tri1.1 VR2.1 | length 17.1
  Bottom Layer w0.35: tri1.1 14.846,-45.58 VR2.1 16.949,-43.477 R28.2
  Bottom Layer w4: Load1.2 9.55,-48.184 tri1.1
NetMOC1_1: MOC1.1 R27.1
NetMOC1_4: MOC1.4 tri1.3
NetMOC1_6: MOC1.6 R29.2 | length 3
  Bottom Layer w0.35: MOC1.6 10.566,-36.766 R29.2
"NetNOKIA 1_11": "NOKIA 1.11" R16.2
Netpc1_1: pc1.1 R26.1
NetQ1_1: Q1.1 R3.2
NetR19_2: R19.2 R20.1 | length 17.8
  Bottom Layer w0.35: R20.1@23.19,-39.218 23.901,-39.218 27.94,-43.256 27.94,-44.196 30.861,-47.117 32.995,-47.117 35.585,-49.708 R19.2
NetR21_1: R21.1 U2.2
NetR22_1: R22.1 U2.1
NetR23_2: R23.2 U2.31
NetR24_2: R24.2 U2.34
RESET: C8.2 IC1.4 R12.1
rx: IC1.9 R22.2
SCL: IC1.18 R4.2 U1.6
SDA: IC1.19 R6.2 U1.5
Sens: C4.2 P1.2 R5.1
sw1: IC1.28 R8.1 ST1.2
SW2: IC1.27 R9.1 ST2.2
sw3: IC1.25 R10.1 ST3.2
SW4: IC1.26 R11.1 ST4.2
TCK: IC1.24 Program.3
TMS: IC1.23 Program.4
triakPulse: IC1.30 R27.2
tx: IC1.8 R21.2
VCC-3.3v: "NOKIA 1.7" "NOKIA 1.8" C1.2 C5.2 C6.2 C7.2 C13.1 C14.2 D1.2 D2.2 IC1.1 IC1.5 IC1.17 R4.1 R6.1 R8.2 R9.2 R10.2 R11.2 R12.2 R25.2 U1.8 U2.12 VR1.2 VR1.4 | length 29.4
  Bottom Layer w0.35: IC1.1 15.285,20.695 17.164,22.574 17.164,23.895 ; IC1.5 17.996,23.895 20.396,26.295 IC1.17 23.707,26.295 C5.2 ; VR1.4 VR1.2 ; C13.1 43.563,1.194 C7.2
VCC_5V: C18.2 C19.1 IC2.3 Program.2 R1.1 R2.1 VR1.3 | length 20.6
  Top Layer w0.35: v1(37.262,-16.053) 37.262,-11.058 C19.1
  Bottom Layer w0.35: VR1.3 39.019,-6.821 C19.1 40.673,-7.647 C18.2 ; IC2.3 36.395,-15.161 37.262,-16.027 v1(37.262,-16.053)
ZeroCross: IC1.29 pc1.4 R25.1
pads on no net: D1.0 D2.0 D3.0 D4.0 D5.0 D6.0 IC1.2 IC1.3 IC1.20 IC1.22 MOC1.3 MOC1.5 U2.3 U2.4 U2.5 U2.6 U2.7 U2.8 U2.9 U2.10 U2.11 U2.14 U2.15 U2.16 U2.17 U2.18 U2.19 U2.20 U2.23 U2.24 U2.25 U2.26 U2.27 U2.28 U2.29 U2.30 U2.32 U2.33

## Other copper
Top Layer:
  rectangle net GND: 8.903,31.14 9.728,37.592
  rectangle net GND: 16.185,31.14 17.087,37.516
  rectangle net GND: 14.472,31.166 15.011,37.516

## Silkscreen, mask and mechanical layers (free items; w line width, h text height)
Bottom Overlay:
  drawing of 3 lines, arcs and shapes, not listed
  text "Serial : AR-L0202" at 34.577,41.642 h0.5
  text "+" at -0.062,37.084 h0.5 r270
  text "Don't Touch" at 21.983,-17.661 h1

## Text inside footprints (layer, text, board x,y; h text height)
Buzzer1: Bottom Overlay "+" at -2.987,-10.439 h0.5 r180